# Altium PCB pilar_1.PcbDoc
Units mm, origin at the board's own origin, x right, y up, seen from the top; angles counter-clockwise.
Board outline 44.51 x 60 mm, 2 copper layers (Top Layer, Bottom Layer); 6 components, 3 nets, 14 pads, 1 vias.
Unrouted connection lines stored in the file: 1.
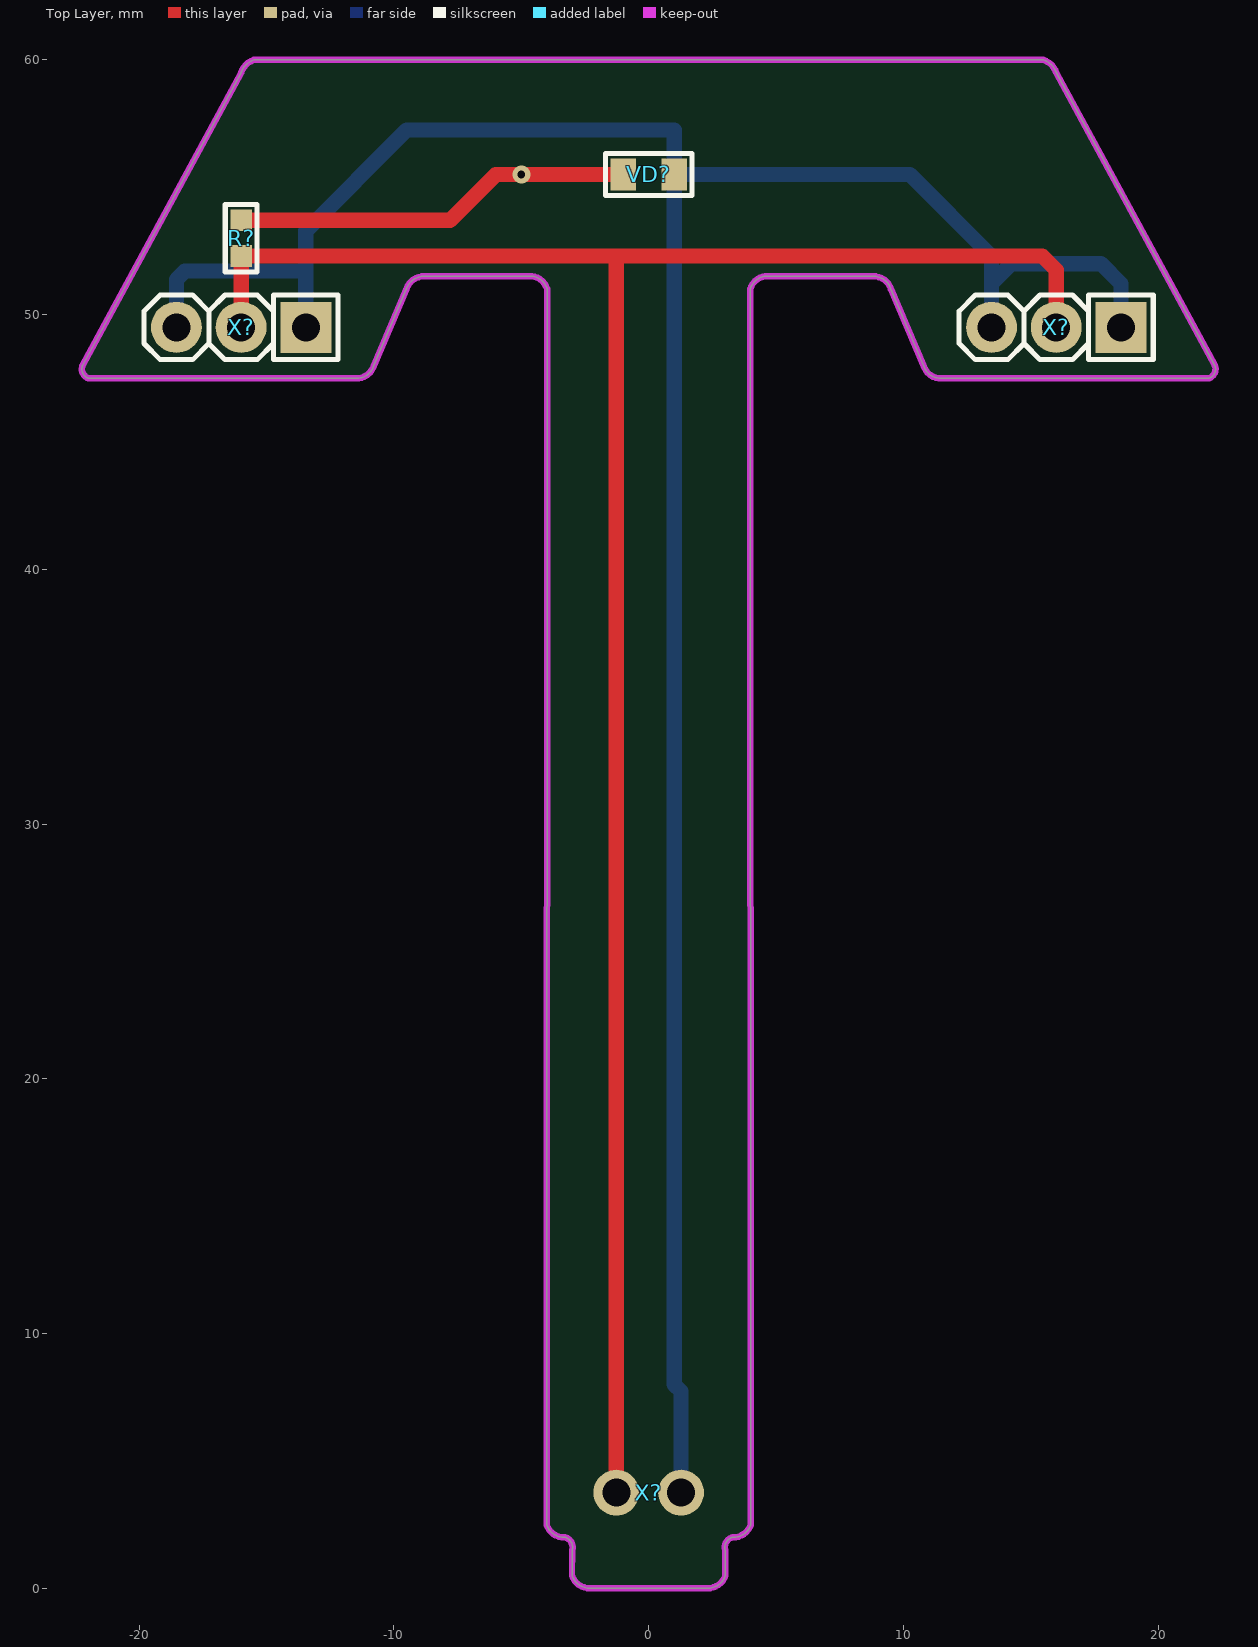
[diagram p0: Top Layer view]
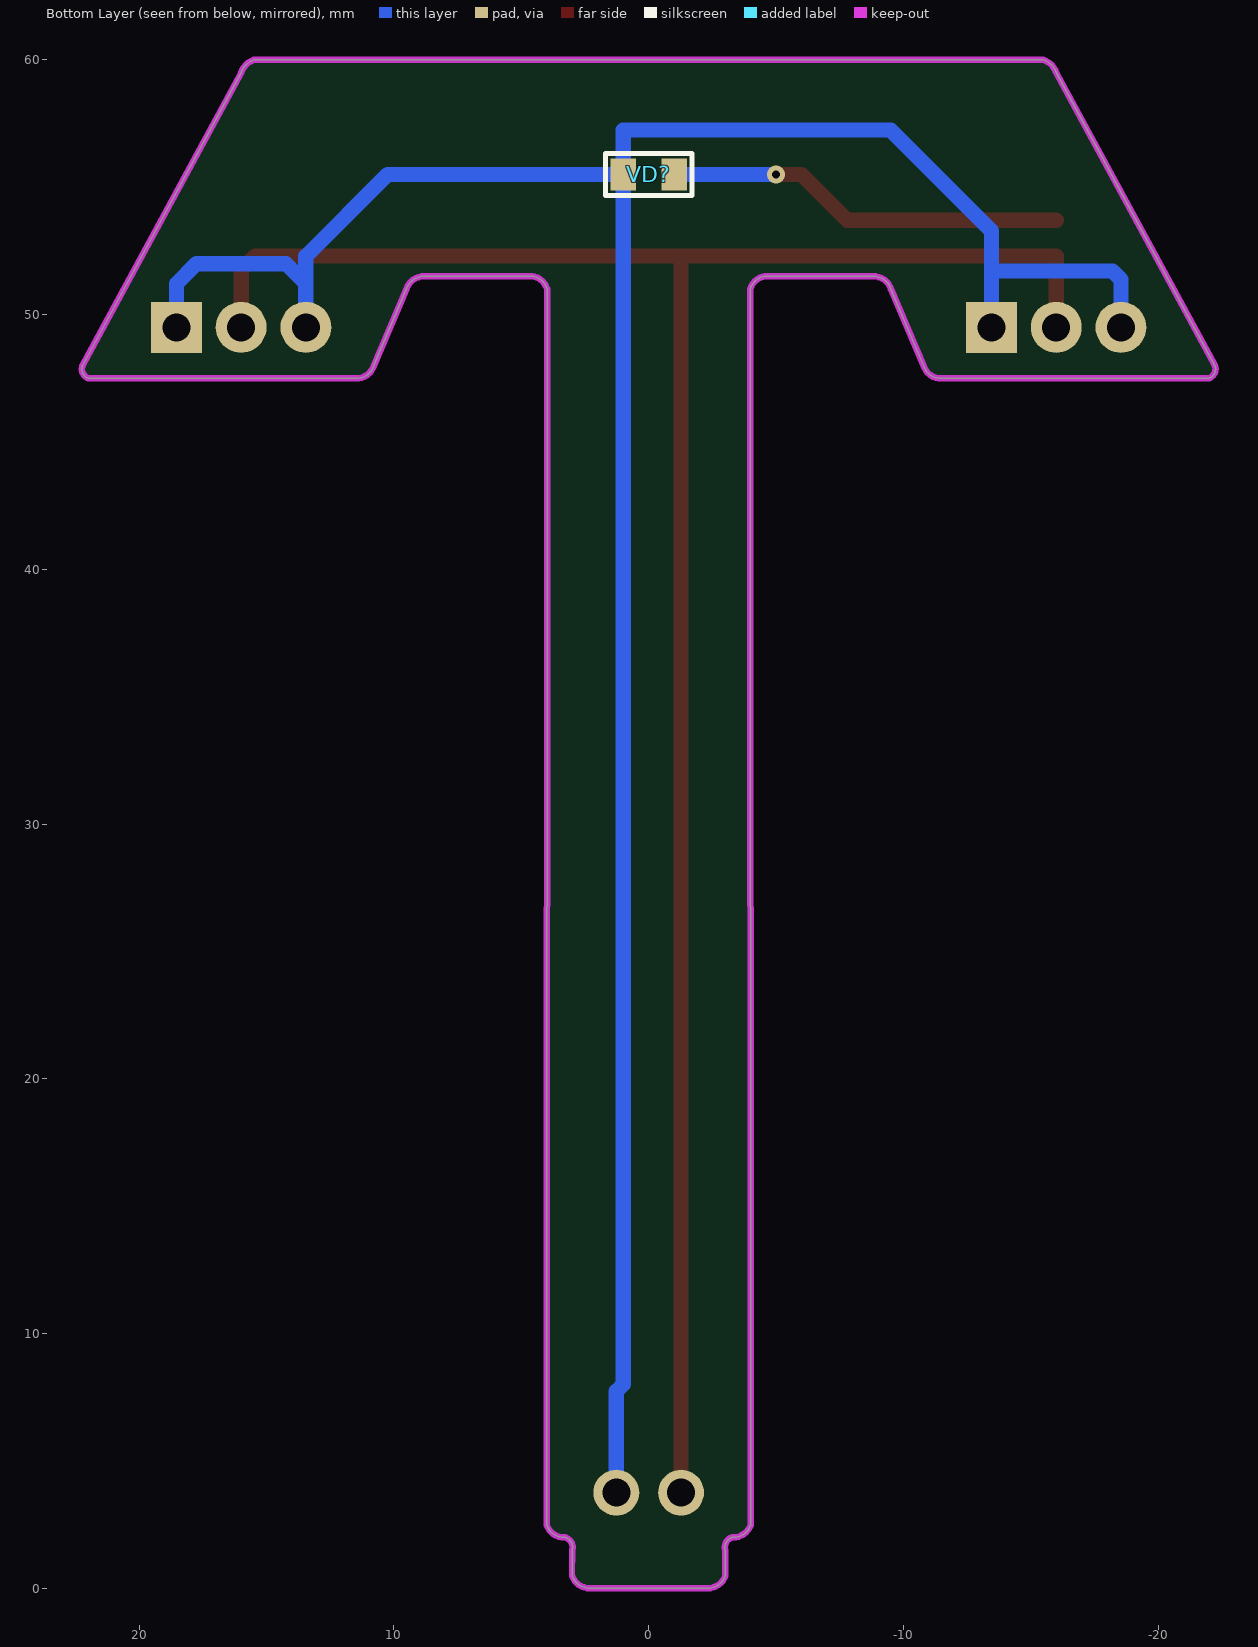
[diagram p1: Bottom Layer view, seen from below]
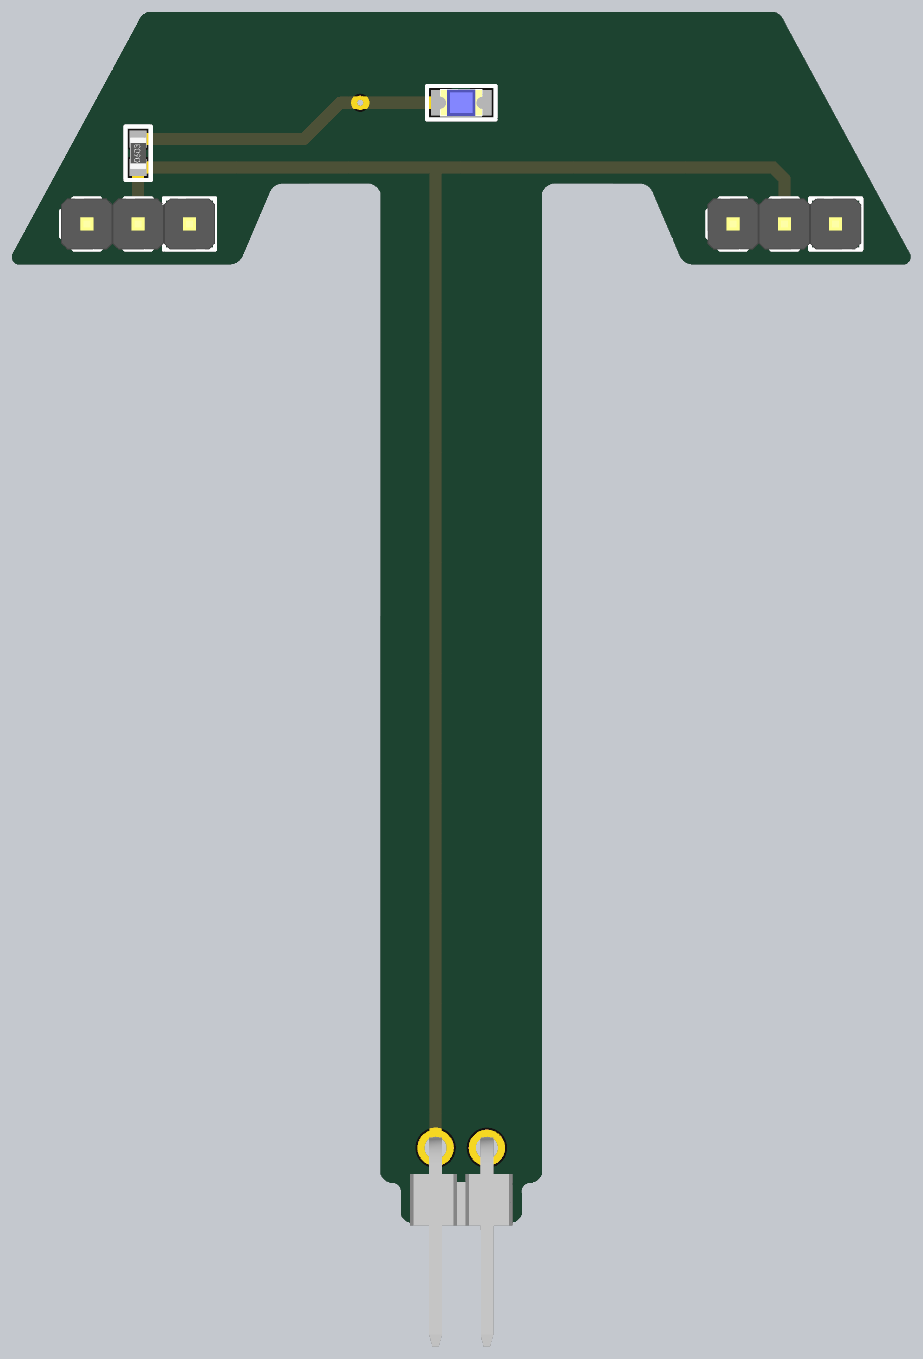
[diagram p2: 3D render of the assembled board from above, using the file's embedded part models]

## Layer stack, top to bottom
Top Solder: solder mask 0.0102, Solder Resist, Dk 3.5
Top Layer: signal copper 0.0356
Dielectric 1: dielectric 0.32, FR-4, Dk 4.8
Bottom Layer: signal copper 0.0356
Bottom Solder: solder mask 0.0102, Solder Resist, Dk 3.5

## Board outline
-22,47.5 -11.5,47.5 ccw(c-11.463,48.203) -10.789,48 -9.511,51 cw(c-8.837,50.797) -8.8,51.5 -4.7,51.509 cw(c-4.663,50.806) -3.989,51.009 -4.011,2.5 ccw(c-3.337,2.703) -3.3,2 cw(c-3.4,1.6) -3,1.5 -3.011,0.5 ccw(c-2.337,0.703) -2.3,0 2.3,0 ccw(c2.337,0.703) 3.011,0.5 3,1.5 cw(c3.4,1.6) 3.3,2 ccw(c3.337,2.703) 4.011,2.5 3.989,51.009 cw(c4.663,50.806) 4.7,51.509 8.8,51.5 cw(c8.837,50.797) 9.511,51 10.789,48 ccw(c11.463,48.203) 11.5,47.5 22,47.5 ccw(c21.865,47.865) 22.23,48 16,59.5 ccw(c15.25,59.25) 15.5,60 -15.5,60 ccw(c-15.25,59.25) -16,59.5 -22.23,48 ccw(c-21.865,47.865)

## Design rules (kind name [scope] priority, off if disabled: settings)
Clearance [All] p1: gap=0.25 ignorepadtopadclearanceinfootprint=FALSE
PolygonConnect [All] p1: connectstyle=Relief reliefconductorwidth=0.254 reliefentries=4 polygonreliefangle="90 Angle" airgapwidth=0.254
RoutingVias [All] p1: holewidth=0.711 width=1.27 viastyle="Through Hole" minholewidth=0.711 minwidth=1.27 maxholewidth=0.711 maxwidth=1.27
SolderMaskExpansion [All] p1: expansion=0.102
Width [All] p1: maxlimit=10 minlimit=0.2 preferedwidth=0.4 minimp=50.000000 maximp=50.000000 favimp=50.000000
30 further rules are at their usual default settings.

## Classes and differential pairs
component class pilar_1: R? VD? X?

## Components (designator, comment, footprint, x,y, rotation, side; value= is the part's Value field where it differs from the comment)
R? "Resistor film, 100R, ±5%, 0603, 0.1W, -55...+125°C" "RES: 0603" -16,53 r90 top value=100R
VD? "LED, *, *, *, -55...+150°C" "LED: 0805B" 0,55.5 r0 bottom
VD? "LED, *, *, *, -55...+150°C" "LED: 0805B" 0,55.5 r0 top
X? "Connector, 2pin, 2.54mm, 500VAC, 3A" "2PLS right angle" 0,3.75 r180 top
X? "Connector, 3pin, 2.54mm, 500VAC, 3A" "CON: PLS-3" 16,49.5 r180 top
X? "Connector, 3pin, 2.54mm, 500VAC, 3A" "CON: PLS-3" -16,49.5 r180 top

## Footprints (in the part's own frame and the unit in brackets; to place one, negate y for a bottom-side part, rotate by r counter-clockwise, add the part's x,y. Pads: shape width x height; smd on the part's side, far side on the other; paste and mask are expansions set on the pad)
"2PLS right angle" [mm]
  round 1.8 hole 1.1: 1(-1.27,0) 2(1.27,0)
  body extent -2.54,-0.52 2.54,9.84, height 2.57
"CON: PLS-3" [mm]
  rect 2x2 hole 1.1: 1(-2.54,0)
  round 2 hole 1.1: 2(0,0) 3(2.54,0)
  silkscreen extent -3.81,-1.27 3.81,1.27, body extent -3.81,-1.27 3.81,1.27, height 8.54
"LED: 0805B" [mm]
  rect 1x1.25 smd: 1(-1,0) 2(1,0)
  silkscreen extent -1.7,-0.82 1.7,0.82, body extent -1.05,-0.67 1.05,0.68, height 0.9
"RES: 0603" [mm]
  rect 0.85x0.85 smd: 1(-0.7,0) 2(0.7,0)
  silkscreen extent -1.33,-0.63 1.33,0.63, body extent -0.8,-0.4 0.8,0.4, height 0.44

## Part data
R?: library part Resistor_0603, Manufacturer=Yageo, Package=0603, PartNumber=RC0603JR-07100RL, Power=0.1W, Temperature=-55...+125°C, Tolerance=±5%, TypeResistor="Resistor film", HelpURL=https://www.digikey.com/product-detail/en/yageo/RC0603JR-07100RL/311-100GRCT-ND/729644, ValueManufacturerPartNumber="Resistor film, 100R, ±5%, 0603, 0.1W, -55...+125°C"
VD? VD?: library part LED_single, Color=GREEN, Temperature=-55...+150°C, TypeDiode=LED, ValueManufacturerPartNumber="LED, *, *, *, -55...+150°C"
X?: library part PLS-2, CurrentMax=3A, Manufacturer=Connfly, VoltageMax=500VAC, CommentText="\"Ðàçúåì\"", HelpURL=https://www.chipdip.ru/product/pls-2, Multichannel=2pin, PartNumber=PLS-2, Pitch=2.54mm, TypeConnector=Connector, ValueManufacturerPartNumber="Connector, 2pin, 2.54mm, 500VAC, 3A"
X? X?: library part PLS-3, CurrentMax=3A, Manufacturer=Connfly, VoltageMax=500VAC, CommentText="\"Ðàçúåì\"", HelpURL=https://www.chipdip.ru/product/pls-3, Multichannel=3pin, PartNumber=PLS-3, Pitch=2.54mm, TypeConnector=Connector, ValueManufacturerPartNumber="Connector, 3pin, 2.54mm, 500VAC, 3A"

## Via types
v1: diameter 0.7, hole 0.3, Top Layer to Bottom Layer, 1 vias

## Nets (pads, with @x,y where several pads share a name; then routed paths per layer and width w, separated by ;. In a path a pad name is that pad's centre, name@x,y a point inside that pad or via, vN(x,y) a via of type N, cw(c..) or ccw(c..) an arc to the next point about the centre after c; other vN are vias at no path point)
GND: VD?.2 X?.1 X?.3 | length 104.6
  Bottom Layer w0.6: X?.3@-18.54,49.5 -18.54,51.38 -18.21,51.71 -13.46,51.71 ; X?.1@-13.46,49.5 -13.46,51.71 ; X?.1@1.27,3.75 1.27,7.73 1,8 VD?.2@1,55.5 ; X?.3@13.46,49.5 13.46,51.21 ; X?.1@18.54,49.5 18.54,51.21 17.75,52 14.25,52 13.46,51.21 ; -13.46,51.71 -13.46,53.29 -9.5,57.25 1,57.25 VD?.2@1,55.5 ; VD?.2@1,55.5 10.25,55.5 13.46,52.29 13.46,51.21
NetR?_2: R?.2 VD?.1 | length 19.7
  Top Layer w0.6: R?.2 -7.8,53.7 -6,55.5 v1(-5,55.5) VD?.1@-1,55.5
  Bottom Layer w0.6: v1(-5,55.5) VD?.1@-1,55.5
VCC: R?.1 X?.2 | length 85.8
  Top Layer w0.6: X?.2@-16,49.5 R?.1 -1.25,52.3 ; X?.2@-1.27,3.75 -1.27,52.28 -1.25,52.3 ; X?.2@16,49.5 16,51.75 15.45,52.3 -1.25,52.3

## Keep-outs
Keep-Out Layer:
  the board outline again, w0.254